# Altium PCB CHARGER.PcbDoc
Units mm, origin at the board's own origin, x right, y up, seen from the top; angles counter-clockwise.
Board outline 151.13 x 70.99 mm, 2 copper layers (Top Layer, Bottom Layer); 23 components, 27 nets, 51 pads, 0 vias.
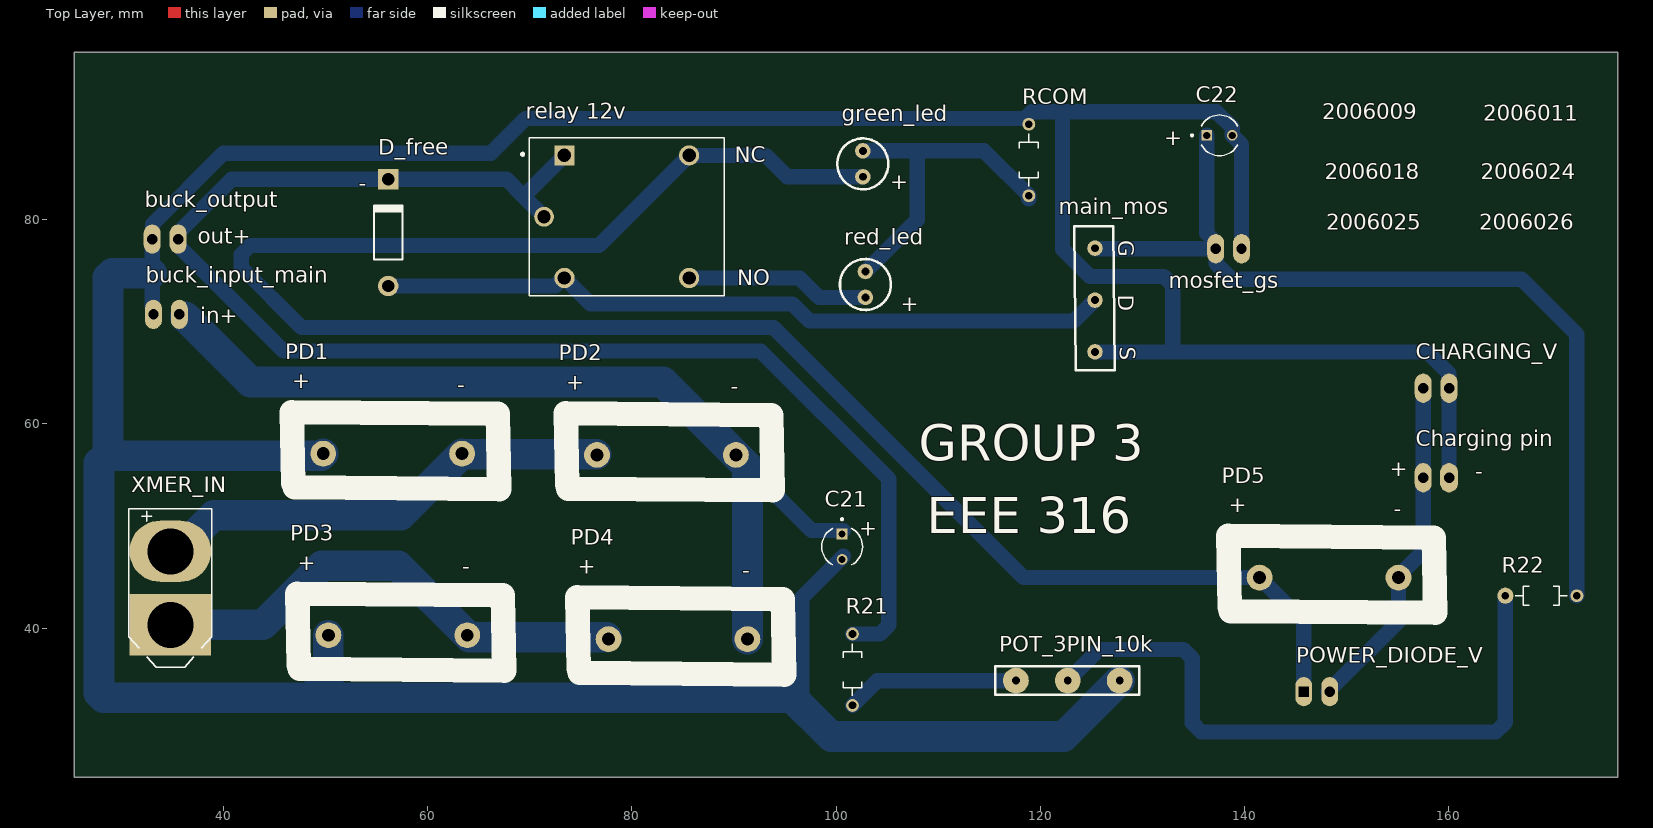
[diagram p0: Top Layer view]
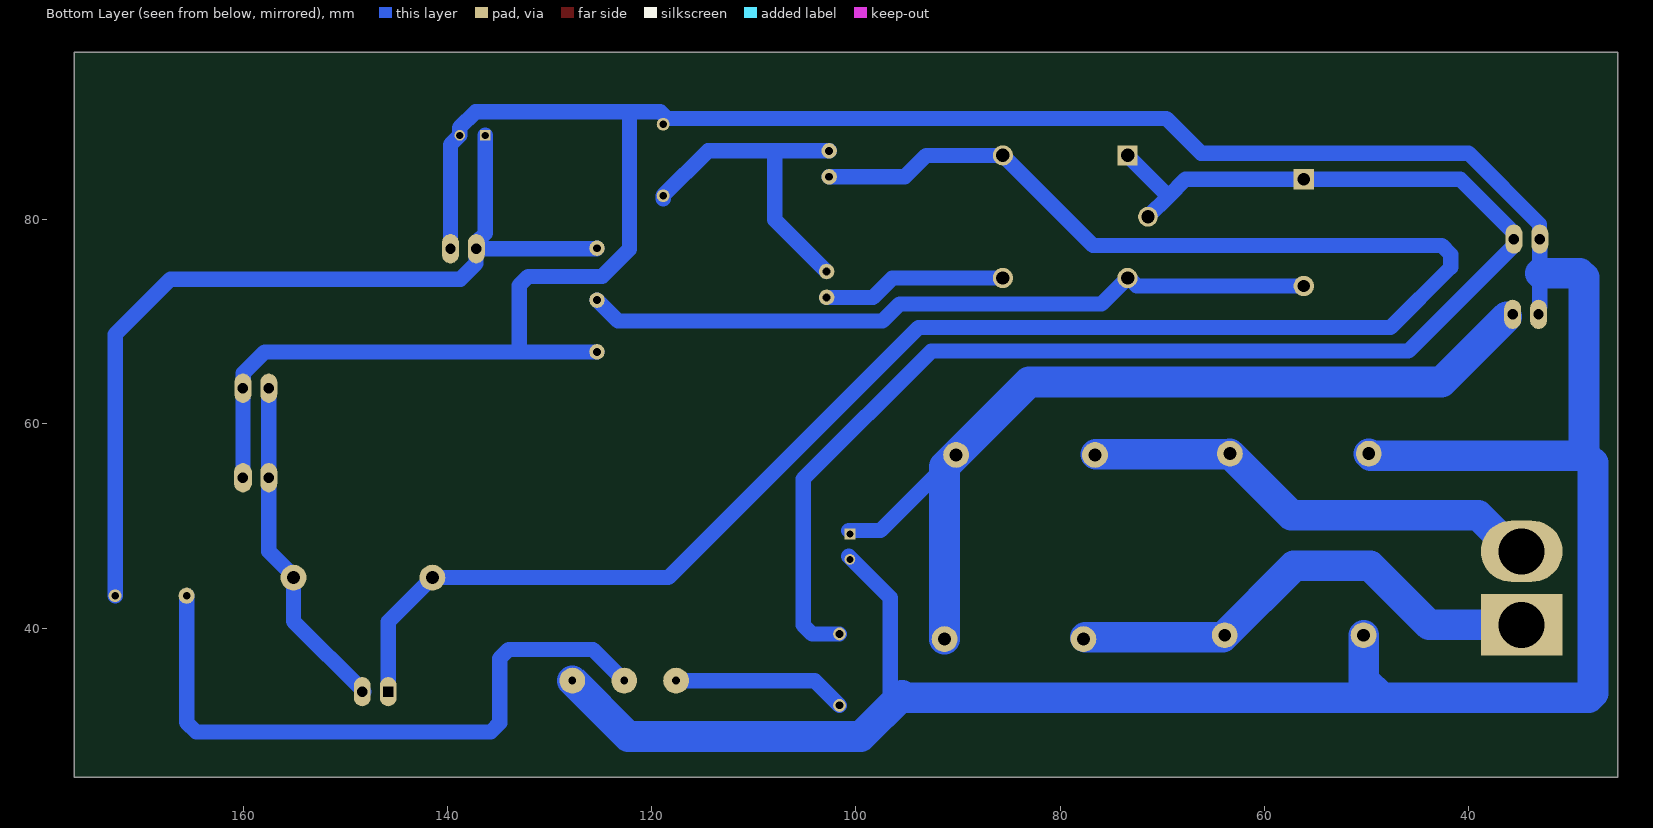
[diagram p1: Bottom Layer view, seen from below]
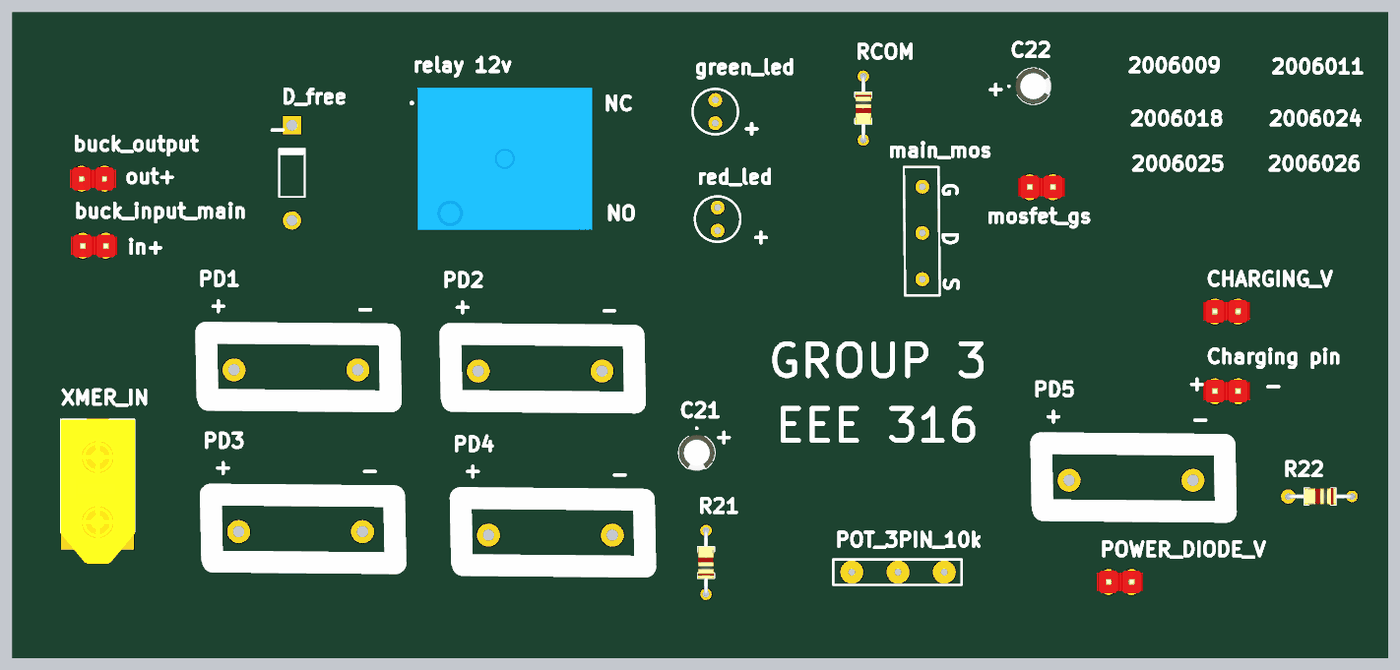
[diagram p2: 3D render of the assembled board from above, using the file's embedded part models]

## Layer stack, top to bottom
Top Solder: solder mask 0.0102, Solder Resist, Dk 3.5
Top Layer: signal copper 0.0356
Dielectric 1: dielectric 0.32, FR-4, Dk 4.8
Bottom Layer: signal copper 0.0356
Bottom Solder: solder mask 0.0102, Solder Resist, Dk 3.5

## Board outline
25.4,25.4 176.53,25.4 176.53,96.393 25.4,96.393

## Design rules (kind name [scope] priority, off if disabled: settings)
Clearance [All] p1: gap=0.8 ignorepadtopadclearanceinfootprint=FALSE
PolygonConnect [All] p1: connectstyle=Relief reliefconductorwidth=0.254 reliefentries=4 polygonreliefangle="90 Angle" airgapwidth=0.254
RoomDefinition CHARGER [InComponentClass('CHARGER')] p1: confinementstyle=ConfineIn formatcopy=TRUE lockcomponents=FALSE outline 1.397,19.121 301.244,19.121 301.244,132.659 1.397,132.659
RoutingVias [All] p1: holewidth=0.711 width=1.27 viastyle="Through Hole" minholewidth=0.711 minwidth=1.27 maxholewidth=0.711 maxwidth=1.27
SolderMaskExpansion [All] p1: expansion=0.102 istentingtop=FALSE
Width [All] p1: maxlimit=3 minlimit=1.5 preferedwidth=1.7 minimp=50.000000 maximp=50.000000 favimp=50.000000
30 further rules are at their usual default settings.

## Classes and differential pairs
component class PE: buck_input_main C21 C22 POT_3PIN_10k R21 R22

## Components (designator, comment, footprint, x,y, rotation, side; value= is the part's Value field where it differs from the comment)
buck_input_main "2PIN" pin2#1 33.147,70.739 r270 top
buck_output "2PIN" pin2#1 33.02,78.105 r270 top
C21 "1000uF cap" "4.7UF CAP" 100.584,47.986 r270 top
C22 "10uF cap" "4.7UF CAP" 137.541,88.265 r0 top
"Charging pin" "2PIN" pin2#2 160.02,54.737 r90 top
CHARGING_V "2PIN" pin2#1 160.02,63.5 r90 top
D_free "Diode 1N4934" DO-41 56.134,78.74 r90 top
green_led "COLOR" led_2 102.616,84.201 r90 top
main_mos "irf250" mosfetIRF250 125.349,77.216 r270 top
mosfet_gs "2PIN" pin2#1 139.7,77.16 r90 top
PD1 "POWER DIODE" "power diode" 49.773,57.094 r0 top
PD2 "POWER DIODE" "power diode" 76.581,56.967 r0 top
PD3 "POWER DIODE" "power diode" 50.281,39.314 r0 top
PD4 "POWER DIODE" "power diode" 77.713,38.933 r0 top
PD5 "POWER DIODE" "power diode" 141.467,44.958 r0 top
POT_3PIN_10k "POT_3PIN" pot_3pin 117.602,34.869 r0 top
POWER_DIODE_V "2PIN" pin2#3 148.336,33.782 r90 top
R21 "10K" RESAD700W45L350D185#1 101.6,35.941 r270 top
R22 "1K" RESAD700W45L350D185#2 169.037,43.18 r0 top
RCOM "1K" RESAD700W45L350D185#1 118.872,85.852 r90 top
red_led "COLOR" led_2 102.87,72.39 r90 top
"relay 12v" "SRD-05VDC-SL-C" RELAY_SRD-05VDC-SL-C 79.498,80.295 r0 top
XMER_IN "HEADER, 2 PINS" "XT60 MALE" 34.798,40.33 r90 top

## Footprints (in the part's own frame and the unit in brackets; to place one, negate y for a bottom-side part, rotate by r counter-clockwise, add the part's x,y. Pads: shape width x height; smd on the part's side, far side on the other; paste and mask are expansions set on the pad)
"4.7UF CAP" [mm]
  round 1.05 hole 0.7: N(1.25,0)
  rect 1.05x1.05 hole 0.7: P(-1.25,0)
  silkscreen extent -2.79,-2 1.78,2, body extent -2,-2 2,2, height 7
DO-41 [mm] "Diode, Axial; Body 5.2 x 2.7 mm (LxDia. max), Lead Dia. 0.86 mm (max)"
  round 2 hole 1.2: 1(-5.23,0)
  rect 2x2 hole 1.2: 2(5.23,0)
  silkscreen extent -2.65,-1.41 2.75,1.4
led_2 [mil]
  round 60 hole 30: 1(0,0) 2(100,0)
  silkscreen extent -48,-98 148,98
mosfetIRF250 [mil]
  round 60 hole 30: 1(0,0) 2(200,0) 3(400,0)
  silkscreen extent -85,-80 470,76
pin2#1 [mm]
  oval 2.86x1.65 hole 1.016: 1(0,2.54) 2(0,0)
  body extent -1.23,-1.27 1.27,3.81, height 8.55
pin2#2 [mm]
  oval 2.86x1.65 hole 1.016: 1(0,2.54)
  oval 2.86x1.75 hole 1.016: 2(0,0)
  body extent -1.23,-1.27 1.27,3.81, height 8.55
pin2#3 [mm]
  oval 2.86x1.65 hole 1.016 square: 1(0,2.54)
  oval 2.86x1.65 hole 1.016: 2(0,0)
  body extent -1.23,-1.27 1.27,3.81, height 8.55
pot_3pin [mil]
  round 99.37 hole 30: 1(0,0) 2(200,0) 3(400,0)
  silkscreen extent -80,-55 475,55
"power diode" [mm]
  round 2.524 hole 1.262: 1(0,0) 2(13.6,0)
  silkscreen extent -3.06,-3.47 17.22,4.08
RELAY_SRD-05VDC-SL-C [mm]
  rect 1.98x1.98 / inner round 1.98 / far side rect 1.98x1.98 hole 1.32: A1(-6.1,6)
  round 1.98 hole 1.32: A2(-6.1,-6) NC(6.1,6) NO(6.1,-6)
  round 1.935 hole 1.29: COM(-8.1,0)
  silkscreen extent -10.3,-7.75 9.55,7.75, body extent -9.6,-7.8 9.6,7.8, height 15.8
RESAD700W45L350D185#1 [mm]
  round 1.258 hole 0.75: 1(-3.5,0) 2(3.5,0)
  silkscreen extent -2.55,-0.92 2.55,0.92, body extent -3.72,-0.92 3.72,0.92, height 1.85
RESAD700W45L350D185#2 [mm]
  round 1.58 hole 0.75: 1(-3.5,0)
  round 1.258 hole 0.75: 2(3.5,0)
  silkscreen extent -2.55,-0.92 2.55,0.92, body extent -3.72,-0.92 3.72,0.92, height 1.85
"XT60 MALE" [mm]
  rect 6x8 hole 4.5: 1(0,0)
  oval 6x8 hole 4.5: 2(7.2,0)
  silkscreen extent -4.15,-4.05 11.35,4.05, body extent -4.52,-4.08 11.38,4.07, height 16.5

## Part data
C21 C22: library part "4.7uF cap", "CAP ALUM 4.7UF 20% 50V RADIAL", Package="RADIAL-2 Panasonic", Availability="In Stock", Check_prices=https://www.snapeda.com/parts/ECE-A1HKA4R7I/Panasonic/view-part/2342017/?ref=eda, MF=Panasonic, MP=ECE-A1HKA4R7I, Price=None, Purchase-URL=https://pricing.snapeda.com/search/part/ECE-A1HKA4R7I/?ref=eda, SnapEDA_Link=https://www.snapeda.com/parts/ECE-A1HKA4R7I/Panasonic/view-part/2342017/?ref=snap
D_free: "1 Amp Fast Recovery Rectifier", Code_JEDEC=DO-204-AL, ComponentLink1Description="Manufacturer Link", ComponentLink1URL=http://www.fairchildsemi.com/, ComponentLink2Description=Datasheet, ComponentLink2URL=http://www.fairchildsemi.com/ds/1N%2F1N4934.pdf, DatasheetVersion=1999, LatestRevisionDate=17-Jul-2002, LatestRevisionNote="Re-released for DXP Platform.", PackageDescription="Diode, Axial; Body 5.2 x 2.7 mm (LxDia. max), Lead Dia. 0.86 mm (max)", PackageReference=DO-41, PackageVersion=Aug-1999, Published=8-Jun-2000, Publisher="Altium Limited"
green_led red_led: library part LED_2
main_mos: library part Component_1
R21 R22 RCOM: library part 3-1623927-1, "1 MOhms Â±5% 0.25W, 1/4W Through Hole Resistor Axial - Carbon Film", Package=None, Availability="In Stock", Check_prices=https://www.snapeda.com/parts/3-1623927-1/TE+Connectivity/view-part/?ref=eda, MF="TE Connectivity", MP=3-1623927-1, Price=None, SnapEDA_Link=https://www.snapeda.com/parts/3-1623927-1/TE+Connectivity/view-part/?ref=snap
"relay 12v": "5V Trigger Relay Module For Arduino And Raspberry Pi 5V Trigger Relay Module For Arduino And Raspberry Pi", Package="NON STANDARD-5 Songle Relay", Availability="Not in stock", Check_prices=https://www.snapeda.com/parts/SRD-05VDC-SL-C/Songle+Relay/view-part/?ref=eda, MF="Songle Relay", MP=SRD-05VDC-SL-C, Price=None, SnapEDA_Link=https://www.snapeda.com/parts/SRD-05VDC-SL-C/Songle+Relay/view-part/?ref=snap
XMER_IN: library part "XT60 MALE", "CONNECTOR"

## Nets (pads, with @x,y where several pads share a name; then routed paths per layer and width w, separated by ;. In a path a pad name is that pad's centre, name@x,y a point inside that pad or via, vN(x,y) a via of type N, cw(c..) or ccw(c..) an arc to the next point about the centre after c; other vN are vias at no path point)
"16th pin": 
buck_in+: buck_input_main.1 C21.P PD2.2 PD4.2 | length 90.7
  Bottom Layer w1.5: buck_input_main.1 36.018,70.739 buck_input_main.1@36.272,70.485 ; 91.313,55.835 97.587,49.561 C21.P@100.711,49.561
  Bottom Layer w3: buck_input_main.1@36.272,70.485 42.652,64.105 83.043,64.105 PD2.2 91.313,55.835 PD4.2
buck_input: 
buck_out+: "relay 12v.A1" "relay 12v.COM" buck_output.1 D_free.2 R21.1 | length 143.7
  Bottom Layer w1.5: 71.398,80.295 69.398,82.295 ; 73.398,86.295 69.398,82.295 ; R21.1 104.277,39.441 105.156,40.32 105.156,54.61 92.611,67.155 45.905,67.155 39.525,73.535 35.609,77.451 35.609,78.056 buck_output.1 35.56,78.71 40.82,83.97 67.723,83.97 69.398,82.295
buck_output: 
CHARGE+: "Charging pin.1" CHARGING_V.1 PD5.2 POWER_DIODE_V.2 | length 33.7
  Bottom Layer w1.5: POWER_DIODE_V.2 148.171,33.782 155.067,40.678 PD5.2 155.067,45.099 157.48,47.512 157.48,54.737 CHARGING_V.1
control: 
Gate: C22.P main_mos.1 mosfet_gs.1 R22.2 | length 88.6
  Bottom Layer w1.5: main_mos.1 125.405,77.16 mosfet_gs.1 ; C22.P 136.291,78.675 137.16,77.806 mosfet_gs.1 ; R22.2 172.537,68.763 167.12,74.18 138.716,74.18 137.189,75.708 137.189,77.131 mosfet_gs.1
GND: "Charging pin.2" buck_input_main.2 buck_output.2 C21.N C22.N CHARGING_V.2 main_mos.3 mosfet_gs.2 PD1.1 PD3.1 POT_3PIN_10k.3 RCOM.2 | length 404
  Bottom Layer w1.5: 27.813,33.64 28.692,32.761 ; 27.813,56.215 28.692,57.094 ; 28.321,73.993 29.2,74.872 ; buck_input_main.2@33.147,70.369 33.147,71.385 33.02,71.512 33.02,74.778 buck_output.2 33.049,78.134 33.049,79.557 40.011,86.52 66.2,86.52 69.596,89.916 118.491,89.916 119.14,90.565 122.174,90.565 ; 96.647,33.419 96.647,42.997 C21.N@100.711,47.061 ; main_mos.3 132.842,67.056 157.888,67.056 159.991,64.952 159.991,63.529 CHARGING_V.2 160.02,54.737 ; 132.969,67.183 132.969,73.569 132.09,74.448 124.847,74.448 122.174,77.121 122.174,90.565 ; mosfet_gs.2 139.7,87.356 C22.N 138.791,89.018 137.244,90.565 122.174,90.565
  Bottom Layer w3: 27.813,33.64 27.813,56.215 ; 28.252,33.201 48.524,33.201 ; 28.494,56.896 49.575,56.896 PD1.1 ; 28.692,57.094 28.692,74.364 ; 29.106,74.778 32.987,74.778 ; PD3.1 50.281,34.958 48.524,33.201 ; 94.815,33.201 48.524,33.201 ; 95.486,33.419 99.514,29.391 122.284,29.391 POT_3PIN_10k.3
NetC1_P: 
NetD_free_1: "relay 12v.A2" D_free.1 main_mos.2 | length 72.1
  Bottom Layer w1.5: D_free.1 72.483,73.51 73.268,74.295 73.398,74.295 75.938,71.755 95.709,71.755 97.386,70.078 123.285,70.078 125.343,72.136 main_mos.2
Netgreen_led_2: green_led.2 RCOM.1 red_led.2 | length 32.3
  Bottom Layer w1.5: green_led.2 107.95,86.741 ; red_led.2 107.95,80.01 107.95,86.741 ; RCOM.1@118.872,82.042 RCOM.1 114.483,86.741 107.95,86.741
NetPD1_2: PD1.2 PD2.1 XMER_IN.2 | length 46.6
  Bottom Layer w1.5: PD1.2 PD1.2@63.436,57.031 ; PD2.1@75.819,56.896 76.51,56.896 PD2.1 PD2.1@76.517,57.031
  Bottom Layer w3: XMER_IN.2 35.531,47.53 39.055,51.054 57.333,51.054 PD1.2 ; PD1.2@63.436,57.031 PD2.1@76.517,57.031
NetPD3_2: PD3.2 PD4.1 XMER_IN.1 | length 48.3
  Bottom Layer w1.5: PD3.2 PD3.2@64.072,39.124 ; PD4.1@77.523,39.124 PD4.1
  Bottom Layer w3: XMER_IN.1 43.849,40.33 49.62,46.101 57.094,46.101 PD3.2 ; PD3.2@64.072,39.124 PD4.1@77.523,39.124
NetPOT_3PIN_1: 
NetPOT_3PIN_2: 
NetPOT_3PIN_3: 
NetPOT_3PIN_10k_1: POT_3PIN_10k.1 R21.2 | length 17
  Bottom Layer w1.5: R21.2 104.028,34.869 POT_3PIN_10k.1
NetPOT_3PIN_10k_2: POT_3PIN_10k.2 R22.1 | length 63.9
  Bottom Layer w1.5: POT_3PIN_10k.2 125.732,37.919 133.995,37.919 134.874,37.04 134.874,30.724 135.753,29.845 164.592,29.845 165.537,30.79 R22.1
NetR1_2: 
NetR2_2: 
Netred_led_1: "relay 12v.NO" red_led.1 | length 18.1
  Bottom Layer w1.5: 85.598,74.295 96.421,74.295 98.326,72.39 red_led.1
NetSG3524_01: 
PDI+: "relay 12v.NC" green_led.1 PD5.1 POWER_DIODE_V.1 | length 192.6
  Bottom Layer w1.5: green_led.1 95.216,84.201 93.122,86.295 85.598,86.295 76.773,77.47 42.624,77.47 41.745,76.591 41.745,75.349 47.639,69.455 93.867,69.455 118.364,44.958 141.097,44.958 141.351,45.212 141.351,45.074 PD5.1 145.796,40.629 POWER_DIODE_V.1
ref1: 
ref2: 
VCC_12V: 

## Silkscreen, mask and mechanical layers (free items; w line width, h text height)
Top Overlay:
  text "2006009" at 147.606,89.821 h1.52
  text "2006011" at 163.354,89.694 h1.52
  text "+" at 132.112,87.281 h1.52
  text "NC" at 90.075,85.63 h1.52
  text "2006018" at 147.86,83.979 h1.52
  text "2006024" at 163.1,83.979 h1.52
  text "+" at 105.315,82.963 h1.52
  text "-" at 53.245,82.836 h1.52
  text "2006025" at 147.987,79.026 h1.52
  text "2006026" at 162.973,79.026 h1.52
  text "out+" at 37.497,77.629 h1.52
  text "NO" at 90.329,73.565 h1.52
  text "+" at 106.331,71.025 h1.52
  text "in+" at 37.751,69.882 h1.52
  text "GROUP 3" at 108.109,56.42 h3.52
  text "+" at 154.21,54.896 h1.52
  text "-" at 162.592,54.642 h1.52
  text "EEE 316" at 108.871,49.308 h3.52
  text "+" at 102.267,49.054 h1.52

## Text inside footprints (layer, text, board x,y; h text height)
main_mos: Top Overlay "G" at 127.635,77.978 h1.52 r270; Top Overlay "D" at 127.635,72.644 h1.52 r270; Top Overlay "S" at 127.762,67.564 h1.52 r270
PD1: Top Overlay "-" at 62.886,63.095 h1.52; Top Overlay "+" at 46.757,63.476 h1.52
PD2: Top Overlay "-" at 89.694,62.968 h1.52; Top Overlay "+" at 73.565,63.349 h1.52
PD3: Top Overlay "-" at 63.394,45.315 h1.52; Top Overlay "+" at 47.265,45.696 h1.52
PD4: Top Overlay "-" at 90.826,44.934 h1.52; Top Overlay "+" at 74.697,45.315 h1.52
PD5: Top Overlay "-" at 154.58,50.959 h1.52; Top Overlay "+" at 138.451,51.34 h1.52